# Altium PCB TECLADO-G5-5A.pcbDoc.PcbDoc (part 4 of 4)
Units mil, origin at the board's own origin, x right, y up, seen from the top; angles counter-clockwise.
Board outline 3514 x 3456 mil, 2 copper layers (Top Layer, Bottom Layer); 59 components, 33 nets, 154 pads, 25 vias.
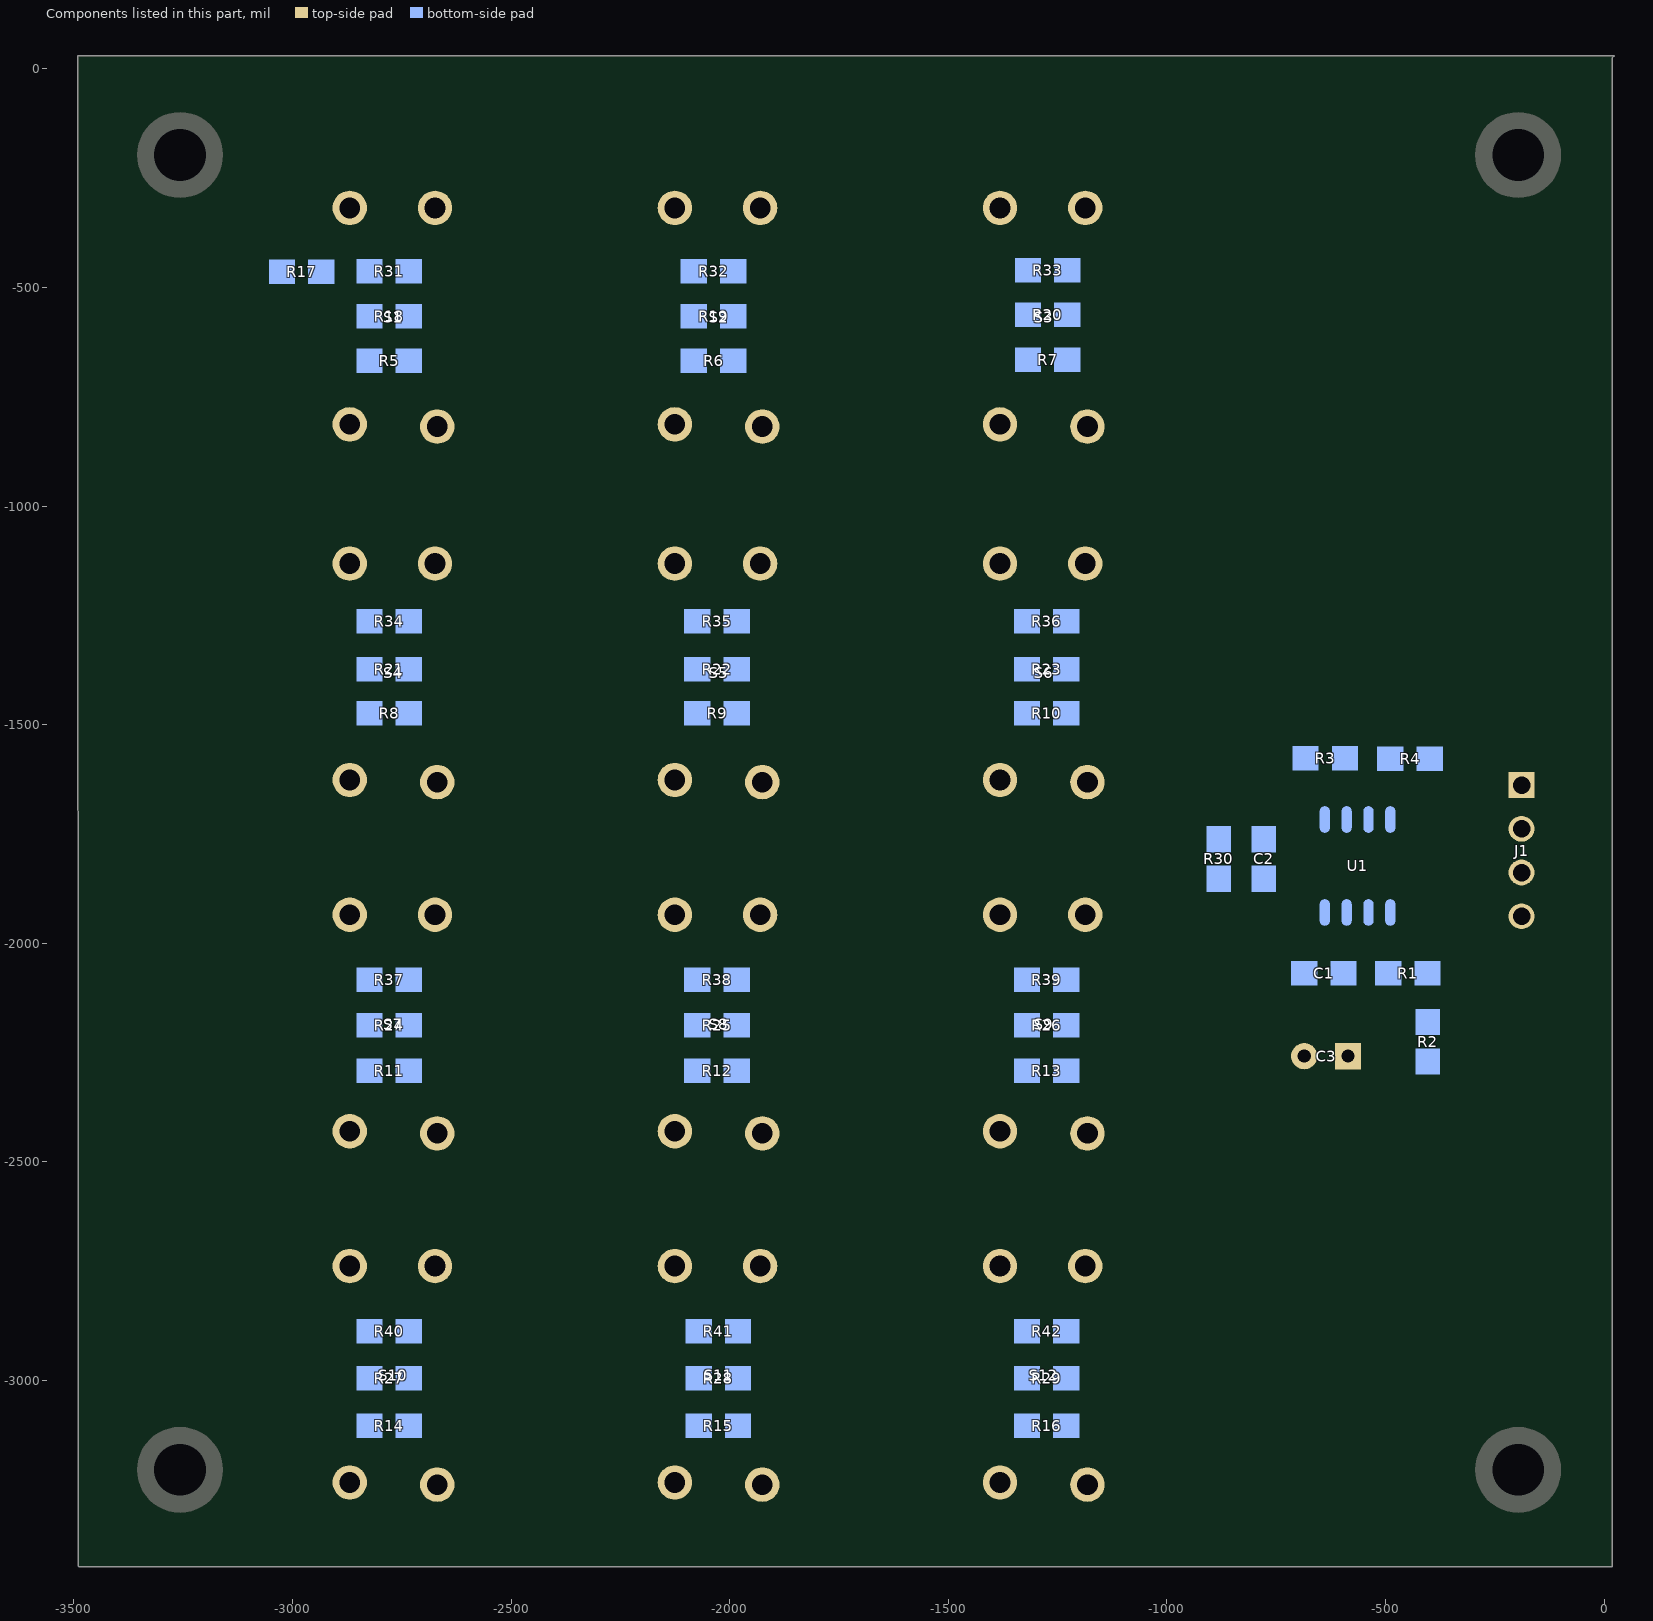
[diagram p4: the components of this part, seen from the top]

## Via types
v1: diameter 66.93, hole 39.37, Top Layer to Bottom Layer, 25 vias

## Nets (pads, with @x,y where several pads share a name; then routed paths per layer and width w, separated by ;. In a path a pad name is that pad's centre, name@x,y a point inside that pad or via, vN(x,y) a via of type N, cw(c..) or ccw(c..) an arc to the next point about the centre after c; other vN are vias at no path point) (continued)
copper on no net: (continued)
  Top Layer w1: -402,-614 -393,-614 ; -402,-484 -395,-484 ; -401,-1021 -394,-1021 ; -401,-1020 -394,-1020 ; -401,-886 -393,-886 ; -401,-613 -391,-613 ; -401,-485 -394,-485 ; -401,-461 -394,-461 ; -400,-1024 -392,-1024 ; -400,-1023 -393,-1023 ; -400,-1022 -393,-1022 ; -400,-885 -393,-885 ; -400,-884 -392,-884 ; -400,-612 -390,-612 ; -400,-486 -395,-486 ; -400,-462 -393,-462 ; -399,-1025 -392,-1025 ; -399,-883 -391,-883 ; -399,-611 -389,-611 ; -399,-463 -391,-463 ; -398,-1027 -390,-1027 ; -398,-1026 -391,-1026 ; -398,-882 -390,-882 ; -398,-803 -367,-803 ; -398,-464 -390,-464 ; -397,-1029 -390,-1029 ; -397,-1028 -390,-1028 ; -397,-881 -389,-881 ; -397,-610 -388,-610 ; -396,-1032 -389,-1032 ; -396,-1031 -389,-1031 ; -396,-1030 -389,-1030 ; -396,-880 -388,-880 ; -396,-879 -387,-879 ; -396,-609 -387,-609 ; -396,-465 -389,-465 ; -395,-1033 -387,-1033 ; -395,-878 -386,-878 ; -395,-466 -388,-466 ; -394,-1035 -387,-1035 ; -394,-1034 -387,-1034 ; -394,-877 -386,-877 ; -394,-608 -386,-608 ; -394,-467 -386,-467 ; -393,-1038 -385,-1038 ; -393,-1037 -386,-1037 ; -393,-1036 -386,-1036 ; -393,-876 -385,-876 ; -393,-616 -382,-616 ; -393,-607 -385,-607 ; -393,-476 -383,-476 ; -393,-468 -385,-468 ; -392,-1039 -385,-1039 ; -392,-875 -383,-875 ; -392,-606 -383,-606 ; -391,-1041 -384,-1041 ; -391,-1040 -385,-1040 ; -391,-874 -382,-874 ; -391,-615 -379,-615 ; -391,-605 -382,-605 ; -391,-475 -390,-475 ; -391,-469 -383,-469 ; -390,-1043 -383,-1043 ; -390,-1042 -383,-1042 ; -390,-873 -382,-873 ; -390,-872 -382,-872 ; -390,-604 -381,-604 ; -389,-1046 -382,-1046 ; -389,-1045 -382,-1045 ; -389,-1044 -382,-1044 ; -389,-871 -380,-871 ; -389,-603 -380,-603 ; -389,-475 -381,-475 ; -389,-470 -381,-470 ; -388,-1047 -381,-1047 ; -388,-870 -379,-870 ; -388,-835 -351,-835 ; -388,-802 -362,-802 ; -388,-614 -378,-614 ; -388,-602 -379,-602 ; -388,-471 -380,-471 ; -387,-1050 -380,-1050 ; -387,-1049 -380,-1049 ; -387,-1048 -380,-1048 ; -387,-613 -377,-613 ; -387,-510 -368,-510 ; -387,-474 -380,-474 ; -386,-1052 -379,-1052 ; -386,-1051 -379,-1051 ; -386,-869 -379,-869 ; -386,-868 -378,-868 ; -386,-601 -378,-601 ; -386,-600 -377,-600 ; -386,-472 -379,-472 ; -385,-1054 -378,-1054 ; -385,-1053 -378,-1053 ; -385,-867 -378,-867 ; -385,-866 -376,-866 ; -385,-612 -375,-612 ; -385,-599 -376,-599 ; -385,-473 -379,-473 ; -384,-1056 -377,-1056 ; -384,-1055 -378,-1055 ; -384,-865 -376,-865 ; -383,-1058 -376,-1058 ; -383,-1057 -377,-1057 ; -383,-864 -376,-864 ; -383,-598 -375,-598 ; -382,-1061 -375,-1061 ; -382,-1060 -375,-1060 ; -382,-1059 -376,-1059 ; -382,-863 -375,-863 ; -382,-862 -375,-862 ; -382,-611 -374,-611 ; -382,-597 -374,-597 ; -381,-1063 -374,-1063 ; -381,-1062 -375,-1062 ; -381,-861 -374,-861 ; -381,-610 -373,-610 ; -381,-596 -374,-596 ; -381,-511 -365,-511 ; -380,-1065 -373,-1065 ; -380,-1064 -374,-1064 ; -380,-860 -374,-860 ; -380,-859 -373,-859 ; -380,-801 -357,-801 ; -380,-595 -373,-595 ; -379,-1068 -372,-1068 ; -379,-1067 -372,-1067 ; -379,-1066 -373,-1066 ; -379,-858 -373,-858 ; -379,-857 -372,-857 ; -379,-609 -372,-609 ; -379,-594 -372,-594 ; -378,-1070 -371,-1070 ; -378,-1069 -372,-1069 ; -378,-856 -372,-856 ; -378,-855 -372,-855 ; -378,-854 -371,-854 ; -378,-853 -371,-853 ; -378,-608 -370,-608 ; -378,-593 -371,-593 ; -377,-1072 -371,-1072 ; -377,-1071 -371,-1071 ; -377,-852 -371,-852 ; -377,-592 -371,-592 ; -377,-512 -363,-512 ; -376,-1074 -369,-1074 ; -376,-1073 -370,-1073 ; -376,-967 -356,-967 ; -376,-966 -351,-966 ; -376,-965 -350,-965 ; -376,-851 -370,-851 ; -376,-850 -370,-850 ; -376,-849 -369,-849 ; -376,-848 -369,-848 ; -376,-607 -369,-607 ; -376,-591 -370,-591 ; -376,-590 -369,-590 ; -375,-1077 -368,-1077 ; -375,-1076 -369,-1076 ; -375,-1075 -369,-1075 ; -375,-847 -369,-847 ; -375,-846 -369,-846 ; -375,-845 -369,-845 ; -375,-844 -369,-844 ; -375,-843 -369,-843 ; -375,-589 -369,-589 ; -375,-513 -362,-513 ; -374,-1079 -368,-1079 ; -374,-1078 -368,-1078 ; -374,-842 -368,-842 ; -374,-841 -368,-841 ; -374,-840 -368,-840 ; -374,-606 -368,-606 ; -374,-588 -369,-588 ; -374,-587 -368,-587 ; -373,-1081 -367,-1081 ; -373,-1080 -368,-1080 ; -373,-834 -347,-834 ; -373,-800 -347,-800 ; -373,-605 -367,-605 ; -373,-586 -368,-586 ; -373,-585 -368,-585 ; -372,-1084 -366,-1084 ; -372,-1083 -367,-1083 ; -372,-1082 -367,-1082 ; -372,-604 -367,-604 ; -372,-584 -368,-584 ; -372,-583 -367,-583 ; -372,-582 -367,-582 ; -372,-514 -360,-514 ; -371,-1087 -365,-1087 ; -371,-1086 -365,-1086 ; -371,-1085 -366,-1085 ; -371,-603 -366,-603 ; -371,-581 -366,-581 ; -371,-580 -367,-580 ; -371,-579 -367,-579 ; -371,-578 -367,-578 ; -370,-1089 -364,-1089 ; -370,-1088 -365,-1088 ; -370,-577 -367,-577 ; -369,-1093 -363,-1093 ; -369,-1092 -364,-1092 ; -369,-1091 -364,-1091 ; -369,-1090 -364,-1090 ; -369,-799 -347,-799 ; -369,-602 -365,-602 ; -369,-576 -367,-576 ; -369,-575 -367,-575 ; -369,-574 -367,-574 ; -369,-573 -367,-573 ; -368,-1096 -362,-1096 ; -368,-1095 -362,-1095 ; -368,-1094 -363,-1094 ; -368,-601 -365,-601 ; -368,-515 -358,-515 ; -367,-1099 -361,-1099 ; -367,-1098 -362,-1098 ; -367,-1097 -362,-1097 ; -367,-964 -346,-964 ; -367,-600 -365,-600 ; -367,-516 -357,-516 ; -366,-1101 -361,-1101 ; -366,-1100 -361,-1100 ; -365,-1106 -360,-1106 ; -365,-1105 -360,-1105 ; -365,-1104 -360,-1104 ; -365,-1103 -361,-1103 ; -365,-1102 -361,-1102 ; -365,-833 -347,-833 ; -365,-798 -347,-798 ; -365,-517 -356,-517 ; -364,-1109 -353,-1109 ; -364,-1108 -356,-1108 ; -364,-1107 -359,-1107 ; -363,-1110 -352,-1110 ; -363,-518 -355,-518 ; -362,-1111 -348,-1111 ; -361,-519 -354,-519 ; -360,-1112 -345,-1112 ; -360,-520 -353,-520 ; -359,-797 -345,-797 ; -359,-521 -352,-521 ; -358,-963 -343,-963 ; -358,-832 -347,-832 ; -358,-522 -351,-522 ; -357,-1113 -342,-1113 ; -357,-840 -350,-840 ; -357,-839 -351,-839 ; -357,-838 -351,-838 ; -357,-837 -351,-837 ; -357,-524 -350,-524 ; -357,-523 -351,-523 ; -356,-841 -350,-841 ; -356,-831 -347,-831 ; -356,-525 -349,-525 ; -355,-1114 -339,-1114 ; -355,-845 -349,-845 ; -355,-844 -349,-844 ; -355,-843 -350,-843 ; -355,-842 -350,-842 ; -355,-526 -348,-526 ; -354,-849 -347,-849 ; -354,-848 -348,-848 ; -354,-847 -348,-847 ; -354,-846 -349,-846 ; -354,-796 -342,-796 ; -354,-527 -348,-527 ; -353,-1115 -337,-1115 ; -353,-962 -341,-962 ; -353,-852 -347,-852 ; -353,-851 -347,-851 ; -353,-850 -347,-850 ; -353,-529 -346,-529 ; -353,-528 -347,-528 ; -352,-854 -346,-854 ; -352,-853 -346,-853 ; -352,-830 -347,-830 ; -352,-704 -350,-704 ; -352,-666 -350,-666 ; -352,-665 -350,-665 ; -352,-664 -349,-664 ; -352,-530 -346,-530 ; -351,-858 -345,-858 ; -351,-857 -345,-857 ; -351,-856 -346,-856 ; -351,-855 -346,-855 ; -351,-829 -347,-829 ; -351,-828 -347,-828 ; -351,-827 -347,-827 ; -351,-826 -347,-826 ; -351,-825 -346,-825 ; -351,-824 -346,-824 ; -351,-823 -346,-823 ; -351,-822 -346,-822 ; -351,-821 -346,-821 ; -351,-820 -346,-820 ; -351,-819 -346,-819 ; -351,-818 -346,-818 ; -351,-817 -346,-817 ; -351,-816 -346,-816 ; -351,-815 -346,-815 ; -351,-814 -346,-814 ; -351,-813 -346,-813 ; -351,-812 -346,-812 ; -351,-811 -346,-811 ; -351,-810 -346,-810 ; -351,-809 -347,-809 ; -351,-808 -347,-808 ; -351,-807 -347,-807 ; -351,-806 -347,-806 ; -351,-805 -347,-805 ; -351,-804 -347,-804 ; -351,-803 -347,-803 ; -351,-802 -347,-802 ; -351,-801 -347,-801 ; -351,-705 -350,-705 ; -351,-703 -349,-703 ; -351,-702 -348,-702 ; -351,-663 -348,-663 ; -351,-662 -348,-662 ; -351,-531 -345,-531 ; -350,-1116 -334,-1116 ; -350,-961 -339,-961 ; -350,-862 -343,-862 ; -350,-861 -344,-861 ; -350,-860 -344,-860 ; -350,-859 -344,-859 ; -350,-795 -341,-795 ; -350,-701 -347,-701 ; -350,-700 -346,-700 ; -350,-661 -348,-661 ; -350,-660 -347,-660 ; -350,-659 -347,-659 ; -350,-658 -346,-658 ; -350,-533 -343,-533 ; -350,-532 -344,-532 ; -349,-866 -343,-866 ; -349,-865 -343,-865 ; -349,-864 -343,-864 ; -349,-863 -343,-863 ; -349,-794 -340,-794 ; -349,-699 -346,-699 ; -349,-657 -346,-657 ; -349,-656 -346,-656 ; -349,-655 -345,-655 ; -349,-534 -343,-534 ; -348,-868 -342,-868 ; -348,-867 -342,-867 ; -348,-698 -345,-698 ; -348,-697 -344,-697 ; -348,-654 -344,-654 ; -348,-653 -344,-653 ; -348,-535 -342,-535 ; -347,-960 -337,-960 ; -347,-872 -341,-872 ; -347,-871 -341,-871 ; -347,-870 -342,-870 ; -347,-869 -342,-869 ; -347,-696 -338,-696 ; -347,-695 -337,-695 ; -347,-652 -344,-652 ; -347,-651 -344,-651 ; -347,-650 -343,-650 ; -347,-649 -343,-649 ; -347,-537 -340,-537 ; -347,-536 -341,-536 ; -346,-1117 -330,-1117 ; -346,-876 -340,-876 ; -346,-875 -340,-875 ; -346,-874 -340,-874 ; -346,-873 -340,-873 ; -346,-694 -337,-694 ; -346,-693 -337,-693 ; -346,-692 -337,-692 ; -346,-648 -343,-648 ; -346,-647 -342,-647 ; -346,-646 -342,-646 ; -346,-645 -342,-645 ; -346,-538 -340,-538 ; -345,-879 -339,-879 ; -345,-878 -339,-878 ; -345,-877 -339,-877 ; -345,-793 -340,-793 ; -345,-792 -340,-792 ; -345,-773 -340,-773 ; -345,-772 -340,-772 ; -345,-771 -340,-771 ; -345,-770 -340,-770 ; -345,-769 -340,-769 ; -345,-768 -340,-768 ; -345,-767 -340,-767 ; -345,-766 -340,-766 ; -345,-765 -340,-765 ; -345,-764 -330,-764 ; -345,-763 -325,-763 ; -345,-762 -323,-762 ; -345,-761 -321,-761 ; -345,-760 -340,-760 ; -345,-759 -340,-759 ; -345,-758 -340,-758 ; -345,-757 -340,-757 ; -345,-756 -340,-756 ; -345,-755 -340,-755 ; -345,-754 -340,-754 ; -345,-753 -340,-753 ; -345,-752 -340,-752 ; -345,-751 -340,-751 ; -345,-750 -340,-750 ; -345,-749 -340,-749 ; -345,-748 -340,-748 ; -345,-747 -340,-747 ; -345,-746 -340,-746 ; -345,-745 -340,-745 ; -345,-744 -340,-744 ; -345,-743 -340,-743 ; -345,-742 -340,-742 ; -345,-741 -340,-741 ; -345,-740 -340,-740 ; -345,-739 -340,-739 ; -345,-738 -339,-738 ; -345,-737 -339,-737 ; -345,-736 -339,-736 ; -345,-735 -339,-735 ; -345,-734 -339,-734 ; -345,-691 -337,-691 ; -345,-644 -341,-644 ; -345,-643 -341,-643 ; -345,-539 -339,-539 ; -344,-959 -336,-959 ; -344,-882 -338,-882 ; -344,-881 -339,-881 ; -344,-880 -339,-880 ; -344,-791 -340,-791 ; -344,-790 -340,-790 ; -344,-789 -340,-789 ; -344,-788 -340,-788 ; -344,-787 -340,-787 ; -344,-786 -340,-786 ; -344,-785 -340,-785 ; -344,-784 -340,-784 ; -344,-783 -340,-783 ; -344,-782 -340,-782 ; -344,-781 -340,-781 ; -344,-780 -340,-780 ; -344,-779 -340,-779 ; -344,-778 -330,-778 ; -344,-777 -327,-777 ; -344,-776 -323,-776 ; -344,-775 -322,-775 ; -344,-774 -339,-774 ; -344,-733 -339,-733 ; -344,-732 -339,-732 ; -344,-731 -339,-731 ; -344,-730 -339,-730 ; -344,-729 -339,-729 ; -344,-728 -339,-728 ; -344,-727 -339,-727 ; -344,-726 -339,-726 ; -344,-725 -339,-725 ; -344,-724 -339,-724 ; -344,-723 -339,-723 ; -344,-722 -339,-722 ; -344,-721 -339,-721 ; -344,-720 -339,-720 ; -344,-719 -339,-719 ; -344,-718 -339,-718 ; -344,-717 -339,-717 ; -344,-716 -339,-716 ; -344,-715 -339,-715 ; -344,-714 -339,-714 ; -344,-713 -339,-713 ; -344,-712 -339,-712 ; -344,-711 -339,-711 ; -344,-710 -339,-710 ; -344,-709 -339,-709 ; -344,-708 -339,-708 ; -344,-707 -339,-707 ; -344,-706 -338,-706 ; -344,-705 -338,-705 ; -344,-704 -338,-704 ; -344,-690 -337,-690 ; -344,-689 -337,-689 ; -344,-642 -340,-642 ; -344,-641 -340,-641 ; -344,-640 -340,-640 ; -344,-541 -338,-541 ; -344,-540 -338,-540 ; -343,-887 -337,-887 ; -343,-886 -337,-886 ; -343,-885 -337,-885 ; -343,-884 -337,-884 ; -343,-883 -338,-883 ; -343,-703 -338,-703 ; -343,-702 -338,-702 ; -343,-701 -338,-701 ; -343,-700 -338,-700 ; -343,-699 -338,-699 ; -343,-698 -338,-698 ; -343,-697 -338,-697 ; -343,-688 -337,-688 ; -343,-687 -337,-687 ; -343,-686 -337,-686 ; -343,-639 -340,-639 ; -343,-638 -339,-638 ; -343,-637 -339,-637 ; -343,-636 -339,-636 ; -343,-635 -339,-635 ; -343,-542 -337,-542 ; -342,-1118 -326,-1118 ; -342,-958 -335,-958 ; -342,-892 -336,-892 ; -342,-891 -336,-891 ; -342,-890 -336,-890 ; -342,-889 -336,-889 ; -342,-888 -336,-888 ; -342,-685 -337,-685 ; -342,-684 -337,-684 ; -342,-634 -338,-634 ; -342,-633 -337,-633 ; -342,-632 -337,-632 ; -342,-631 -337,-631 ; -342,-630 -337,-630 ; -342,-543 -336,-543 ; -341,-1119 -325,-1119 ; -341,-895 -335,-895 ; -341,-894 -335,-894 ; -341,-893 -336,-893 ; -341,-683 -337,-683 ; -341,-682 -336,-682 ; -341,-629 -337,-629 ; -341,-628 -336,-628 ; -341,-545 -334,-545 ; -341,-544 -335,-544 ; -340,-957 -334,-957 ; -340,-899 -334,-899 ; -340,-898 -335,-898 ; -340,-897 -335,-897 ; -340,-896 -335,-896 ; -340,-681 -336,-681 ; -340,-680 -335,-680 ; -340,-679 -335,-679 ; -340,-627 -336,-627 ; -340,-626 -336,-626 ; -340,-625 -336,-625 ; -340,-624 -335,-624 ; -340,-546 -334,-546 ; -339,-956 -334,-956 ; -339,-906 -333,-906 ; -339,-905 -333,-905 ; -339,-904 -333,-904 ; -339,-903 -333,-903 ; -339,-902 -333,-902 ; -339,-901 -333,-901 ; -339,-900 -334,-900 ; -339,-678 -334,-678 ; -339,-677 -334,-677 ; -339,-676 -333,-676 ; -339,-623 -335,-623 ; -339,-622 -335,-622 ; -339,-621 -335,-621 ; -339,-620 -335,-620 ; -339,-619 -334,-619 ; -339,-547 -333,-547 ; -338,-955 -333,-955 ; -338,-954 -333,-954 ; -338,-908 -332,-908 ; -338,-907 -333,-907 ; -338,-675 -333,-675 ; -338,-674 -333,-674 ; -338,-618 -334,-618 ; -338,-617 -333,-617 ; -338,-613 -333,-613 ; -338,-549 -331,-549 ; -338,-548 -332,-548 ; -337,-1120 -321,-1120 ; -337,-953 -333,-953 ; -337,-952 -332,-952 ; -337,-915 -331,-915 ; -337,-914 -332,-914 ; -337,-913 -332,-913 ; -337,-912 -332,-912 ; -337,-911 -332,-911 ; -337,-910 -332,-910 ; -337,-909 -332,-909 ; -337,-673 -332,-673 ; -337,-672 -332,-672 ; -337,-671 -332,-671 ; -337,-616 -333,-616 ; -337,-615 -333,-615 ; -337,-614 -333,-614 ; -337,-612 -333,-612 ; -337,-611 -332,-611 ; -337,-550 -330,-550 ; -336,-951 -332,-951 ; -336,-950 -332,-950 ; -336,-949 -332,-949 ; -336,-948 -332,-948 ; -336,-947 -332,-947 ; -336,-946 -331,-946 ; -336,-925 -324,-925 ; -336,-924 -325,-924 ; -336,-923 -326,-923 ; -336,-922 -326,-922 ; -336,-921 -328,-921 ; -336,-920 -328,-920 ; -336,-919 -329,-919 ; -336,-918 -329,-918 ; -336,-917 -330,-917 ; -336,-916 -331,-916 ; -336,-670 -331,-670 ; -336,-669 -330,-669 ; -336,-668 -331,-668 ; -336,-610 -332,-610 ; -336,-609 -332,-609 ; -336,-608 -332,-608 ; -336,-607 -332,-607 ; -336,-606 -332,-606 ; -336,-605 -332,-605 ; -336,-604 -332,-604 ; -336,-603 -332,-603 ; -336,-602 -332,-602 ; -336,-601 -332,-601 ; -336,-600 -332,-600 ; -336,-599 -332,-599 ; -336,-598 -332,-598 ; -336,-597 -332,-597 ; -336,-596 -332,-596 ; -336,-595 -332,-595 ; -336,-594 -332,-594 ; -336,-593 -332,-593 ; -336,-592 -332,-592 ; -336,-591 -332,-591 ; -336,-590 -332,-590 ; -336,-589 -332,-589 ; -336,-588 -332,-588 ; -336,-587 -332,-587 ; -336,-586 -332,-586 ; -336,-585 -332,-585 ; -336,-584 -332,-584 ; -336,-583 -332,-583 ; -336,-582 -332,-582 ; -336,-581 -332,-581 ; -336,-580 -332,-580 ; -336,-579 -332,-579 ; -336,-578 -332,-578 ; -336,-577 -332,-577 ; -336,-576 -332,-576 ; -336,-575 -332,-575 ; -336,-574 -332,-574 ; -336,-573 -332,-573 ; -336,-572 -332,-572 ; -336,-571 -332,-571 ; -336,-570 -333,-570 ; -336,-569 -333,-569 ; -336,-568 -333,-568 ; -336,-567 -333,-567 ; -336,-566 -333,-566 ; -336,-565 -333,-565 ; -336,-564 -334,-564 ; -336,-563 -334,-563 ; -336,-562 -335,-562 ; -336,-551 -329,-551 ; -335,-945 -331,-945 ; -335,-944 -331,-944 ; -335,-943 -331,-943 ; -335,-942 -331,-942 ; -335,-941 -331,-941 ; -335,-940 -331,-940 ; -335,-939 -331,-939 ; -335,-938 -330,-938 ; -335,-937 -330,-937 ; -335,-936 -330,-936 ; -335,-935 -331,-935 ; -335,-934 -331,-934 ; -335,-933 -331,-933 ; -335,-932 -330,-932 ; -335,-931 -330,-931 ; -335,-930 -331,-930 ; -335,-929 -331,-929 ; -335,-928 -322,-928 ; -335,-927 -322,-927 ; -335,-926 -323,-926 ; -335,-781 -315,-781 ; -335,-780 -325,-780 ; -335,-779 -330,-779 ; -335,-667 -330,-667 ; -335,-666 -330,-666 ; -335,-665 -329,-665 ; -335,-552 -328,-552 ; -334,-782 -316,-782 ; -334,-774 -301,-774 ; -334,-664 -329,-664 ; -334,-553 -327,-553 ; -333,-1121 -318,-1121 ; -333,-760 -319,-760 ; -333,-663 -329,-663 ; -333,-662 -328,-662 ; -333,-661 -327,-661 ; -333,-660 -319,-660 ; -333,-659 -319,-659 ; -333,-554 -326,-554 ; -332,-658 -320,-658 ; -332,-657 -320,-657 ; -332,-656 -320,-656 ; -332,-655 -319,-655 ; -332,-555 -325,-555 ; -331,-654 -326,-654 ; -331,-653 -326,-653 ; -331,-557 -323,-557 ; -331,-556 -324,-556 ; -330,-1122 -314,-1122 ; -330,-783 -317,-783 ; -330,-652 -325,-652 ; -330,-651 -325,-651 ; -330,-650 -325,-650 ; -330,-649 -325,-649 ; -330,-558 -322,-558 ; -329,-1123 -310,-1123 ; -329,-930 -321,-930 ; -329,-929 -321,-929 ; -329,-648 -325,-648 ; -329,-647 -324,-647 ; -329,-646 -324,-646 ; -329,-645 -324,-645 ; -329,-559 -321,-559 ; -328,-1124 -308,-1124 ; -328,-931 -319,-931 ; -328,-773 -306,-773 ; -328,-759 -317,-759 ; -328,-758 -323,-758 ; -328,-644 -324,-644 ; -328,-643 -324,-643 ; -328,-642 -323,-642 ; -328,-641 -323,-641 ; -328,-560 -320,-560 ; -327,-1126 -322,-1126 ; -327,-1125 -322,-1125 ; -327,-932 -318,-932 ; -327,-757 -323,-757 ; -327,-640 -322,-640 ; -327,-639 -322,-639 ; -327,-638 -322,-638 ; -326,-1127 -321,-1127 ; -326,-934 -316,-934 ; -326,-933 -317,-933 ; -326,-772 -311,-772 ; -326,-756 -322,-756 ; -326,-755 -321,-755 ; -326,-637 -322,-637 ; -326,-636 -321,-636 ; -326,-635 -319,-635 ; -326,-634 -318,-634 ; -326,-561 -319,-561 ; -325,-1129 -319,-1129 ; -325,-1128 -320,-1128 ; -325,-935 -316,-935 ; -325,-771 -313,-771 ; -325,-754 -307,-754 ; -325,-654 -318,-654 ; -325,-633 -318,-633 ; -325,-632 -317,-632 ; -325,-631 -316,-631 ; -325,-630 -315,-630 ; -325,-629 -321,-629 ; -325,-628 -320,-628 ; -325,-627 -320,-627 ; -325,-562 -318,-562 ; -324,-1130 -319,-1130 ; -324,-936 -315,-936 ; -324,-753 -305,-753 ; -324,-662 -318,-662 ; -324,-661 -318,-661 ; -324,-653 -317,-653 ; -324,-626 -320,-626 ; -324,-625 -319,-625 ; -324,-624 -319,-624 ; -324,-623 -319,-623 ; -324,-622 -319,-622 ; -324,-563 -317,-563 ; -323,-1131 -318,-1131 ; -323,-937 -314,-937 ; -323,-752 -303,-752 ; -323,-663 -317,-663 ; -323,-652 -316,-652 ; -323,-621 -319,-621 ; -323,-620 -319,-620 ; -323,-564 -316,-564 ; -322,-1133 -316,-1133 ; -322,-1132 -317,-1132 ; -322,-938 -313,-938 ; -322,-758 -314,-758 ; -322,-665 -316,-665 ; -322,-664 -316,-664 ; -322,-651 -314,-651 ; -322,-619 -318,-619 ; -322,-618 -318,-618 ; -322,-617 -318,-617 ; -322,-616 -318,-616 ; -322,-615 -318,-615 ; -322,-614 -318,-614 ; -322,-613 -318,-613 ; -322,-565 -315,-565 ; -321,-1134 -315,-1134 ; -321,-939 -312,-939 ; -321,-780 -314,-780 ; -321,-751 -301,-751 ; -321,-668 -314,-668 ; -321,-667 -315,-667 ; -321,-666 -315,-666 ; -321,-650 -313,-650 ; -321,-612 -318,-612 ; -321,-611 -318,-611 ; -321,-610 -318,-610 ; -321,-609 -317,-609 ; -321,-608 -317,-608 ; -321,-607 -317,-607 ; -321,-606 -317,-606 ; -321,-605 -317,-605 ; -321,-604 -317,-604 ; -321,-566 -314,-566 ; -320,-1135 -278,-1135 ; -320,-941 -310,-941 ; -320,-940 -311,-940 ; -320,-779 -314,-779 ; -320,-757 -313,-757 ; -320,-669 -314,-669 ; -320,-629 -314,-629 ; -320,-603 -317,-603 ; -320,-602 -317,-602 ; -320,-567 -313,-567 ; -319,-1136 -285,-1136 ; -319,-942 -309,-942 ; -319,-778 -313,-778 ; -319,-756 -311,-756 ; -319,-671 -312,-671 ; -319,-670 -313,-670 ; -319,-649 -312,-649 ; -319,-628 -313,-628 ; -319,-601 -317,-601 ; -319,-600 -317,-600 ; -319,-599 -317,-599 ; -319,-598 -317,-598 ; -319,-597 -317,-597 ; -319,-596 -317,-596 ; -319,-595 -317,-595 ; -319,-594 -317,-594 ; -319,-593 -317,-593 ; -319,-592 -317,-592 ; -319,-591 -317,-591 ; -319,-568 -312,-568 ; -318,-1137 -289,-1137 ; -318,-943 -308,-943 ; -318,-777 -313,-777 ; -318,-672 -312,-672 ; -318,-648 -311,-648 ; -318,-627 -313,-627 ; -318,-590 -317,-590 ; -318,-589 -317,-589 ; -318,-588 -317,-588 ; -318,-587 -317,-587 ; -318,-570 -310,-570 ; -318,-569 -311,-569 ; -317,-1138 -296,-1138 ; -317,-1125 -304,-1125 ; -317,-776 -292,-776 ; -317,-775 -295,-775 ; -317,-755 -309,-755 ; -317,-674 -311,-674 ; -317,-673 -311,-673 ; -317,-647 -310,-647 ; -317,-626 -312,-626 ; -317,-571 -309,-571 ; -316,-944 -307,-944 ; -316,-676 -310,-676 ; -316,-675 -311,-675 ; -316,-646 -309,-646 ; -316,-625 -311,-625 ; -316,-572 -308,-572 ; -315,-945 -306,-945 ; -315,-750 -312,-750 ; -315,-677 -310,-677 ; -315,-645 -308,-645 ; -315,-624 -310,-624 ; -315,-623 -310,-623 ; -315,-573 -307,-573 ; -314,-946 -305,-946 ; -314,-680 -308,-680 ; -314,-679 -308,-679 ; -314,-678 -309,-678 ; -314,-644 -307,-644 ; -314,-622 -309,-622 ; -314,-574 -307,-574 ; -313,-947 -304,-947 ; -313,-682 -307,-682 ; -313,-681 -307,-681 ; -313,-643 -306,-643 ; -313,-621 -308,-621 ; -313,-620 -307,-620 ; -313,-575 -306,-575 ; -312,-948 -303,-948 ; -312,-683 -306,-683 ; -312,-642 -305,-642 ; -312,-619 -307,-619 ; -312,-576 -305,-576 ; -311,-949 -302,-949 ; -311,-685 -305,-685 ; -311,-684 -306,-684 ; -311,-641 -304,-641 ; -311,-618 -306,-618 ; -311,-617 -305,-617 ; -311,-577 -304,-577 ; -310,-1126 -303,-1126 ; -310,-950 -300,-950 ; -310,-687 -304,-687 ; -310,-686 -304,-686 ; -310,-640 -303,-640 ; -310,-616 -305,-616 ; -310,-579 -302,-579 ; -310,-578 -303,-578 ; -309,-951 -299,-951 ; -309,-777 -256,-777 ; -309,-688 -304,-688 ; -309,-639 -303,-639 ; -309,-638 -302,-638 ; -309,-615 -304,-615 ; -309,-580 -301,-580 ; -308,-952 -298,-952 ; -308,-781 -303,-781 ; -308,-780 -303,-780 ; -308,-779 -303,-779 ; -308,-778 -247,-778 ; -308,-750 -298,-750 ; -308,-691 -302,-691 ; -308,-690 -303,-690 ; -308,-689 -303,-689 ; -308,-637 -301,-637 ; -308,-614 -304,-614 ; -308,-613 -303,-613 ; -307,-1149 -302,-1149 ; -307,-1148 -302,-1148 ; -307,-1147 -302,-1147 ; -307,-1146 -303,-1146 ; -307,-1145 -302,-1145 ; -307,-1144 -246,-1144 ; -307,-1143 -289,-1143 ; -307,-1142 -298,-1142 ; -307,-1141 -300,-1141 ; -307,-1140 -303,-1140 ; -307,-1139 -303,-1139 ; -307,-1134 -272,-1134 ; -307,-953 -297,-953 ; -307,-784 -302,-784 ; -307,-783 -303,-783 ; -307,-782 -303,-782 ; -307,-693 -301,-693 ; -307,-692 -302,-692 ; -307,-636 -300,-636 ; -307,-612 -303,-612 ; -307,-611 -302,-611 ; -307,-582 -300,-582 ; -307,-581 -300,-581 ; -306,-1154 -301,-1154 ; -306,-1153 -301,-1153 ; -306,-1152 -301,-1152 ; -306,-1151 -301,-1151 ; -306,-1150 -301,-1150 ; -306,-954 -296,-954 ; -306,-786 -286,-786 ; -306,-785 -294,-785 ; -306,-749 -292,-749 ; -306,-695 -301,-695 ; -306,-694 -301,-694 ; -306,-635 -299,-635 ; -306,-610 -301,-610 ; -306,-609 -301,-609 ; -306,-583 -299,-583 ; -305,-1156 -300,-1156 ; -305,-1155 -300,-1155 ; -305,-787 -286,-787 ; -305,-748 -292,-748 ; -305,-697 -300,-697 ; -305,-696 -300,-696 ; -305,-634 -299,-634 ; -305,-608 -300,-608 ; -305,-584 -299,-584 ; -304,-1159 -292,-1159 ; -304,-1158 -300,-1158 ; -304,-1157 -300,-1157 ; -304,-955 -295,-955 ; -304,-700 -299,-700 ; -304,-699 -299,-699 ; -304,-698 -300,-698 ; -304,-633 -298,-633 ; -304,-632 -297,-632 ; -304,-607 -300,-607 ; -304,-606 -300,-606 ; -304,-586 -297,-586 ; -304,-585 -298,-585 ; -303,-1161 -244,-1161 ; -303,-1160 -241,-1160 ; -303,-956 -293,-956 ; -303,-788 -287,-788 ; -303,-703 -297,-703 ; -303,-702 -298,-702 ; -303,-701 -298,-701 ; -303,-631 -296,-631 ; -303,-605 -299,-605 ; -303,-604 -299,-604 ; -303,-603 -298,-603 ; -303,-587 -296,-587 ; -302,-957 -292,-957 ; -302,-747 -292,-747 ; -302,-705 -297,-705 ; -302,-704 -297,-704 ; -302,-630 -296,-630 ; -302,-629 -295,-629 ; -302,-602 -298,-602 ; -302,-600 -297,-600 ; -302,-589 -295,-589 ; -302,-588 -296,-588 ; -301,-958 -291,-958 ; -301,-708 -296,-708 ; -301,-707 -296,-707 ; -301,-706 -296,-706 ; -301,-628 -294,-628 ; -301,-601 -297,-601 ; -301,-599 -297,-599 ; -300,-1162 -248,-1162 ; -300,-959 -290,-959 ; -300,-746 -292,-746 ; -300,-713 -294,-713 ; -300,-712 -294,-712 ; -300,-711 -295,-711 ; -300,-710 -295,-710 ; -300,-709 -296,-709 ; -300,-627 -294,-627 ; -300,-598 -297,-598 ; -300,-597 -290,-597 ; -300,-596 -291,-596 ; -300,-592 -293,-592 ; -300,-591 -294,-591 ; -300,-590 -295,-590 ; -299,-1145 -251,-1145 ; -299,-960 -289,-960 ; -299,-779 -245,-779 ; -299,-718 -293,-718 ; -299,-717 -293,-717 ; -299,-716 -293,-716 ; -299,-715 -294,-715 ; -299,-714 -294,-714 ; -299,-626 -288,-626 ; -299,-625 -288,-625 ; -299,-595 -292,-595 ; -299,-594 -292,-594 ; -299,-593 -293,-593 ; -298,-961 -288,-961 ; -298,-719 -293,-719 ; -298,-624 -289,-624 ; -297,-726 -292,-726 ; -297,-725 -292,-725 ; -297,-724 -292,-724 ; -297,-723 -292,-723 ; -297,-722 -292,-722 ; -297,-721 -293,-721 ; -297,-720 -293,-720 ; -297,-623 -289,-623 ; -297,-622 -289,-622 ; -296,-1133 -267,-1133 ; -296,-962 -287,-962 ; -296,-735 -292,-735 ; -296,-734 -292,-734 ; -296,-733 -292,-733 ; -296,-732 -292,-732 ; -296,-731 -292,-731 ; -296,-730 -292,-730 ; -296,-729 -292,-729 ; -296,-728 -292,-728 ; -296,-727 -292,-727 ; -296,-621 -290,-621 ; -296,-620 -290,-620 ; -296,-598 -290,-598 ; -295,-1163 -254,-1163 ; -295,-1146 -256,-1146 ; -295,-963 -285,-963 ; -295,-751 -292,-751 ; -295,-750 -292,-750 ; -295,-745 -292,-745 ; -295,-743 -292,-743 ; -295,-741 -292,-741 ; -295,-740 -292,-740 ; -295,-739 -292,-739 ; -295,-738 -292,-738 ; -295,-737 -292,-737 ; -295,-736 -292,-736 ; -295,-619 -289,-619 ; -295,-618 -289,-618 ; -295,-600 -289,-600 ; -295,-599 -290,-599 ; -294,-752 -293,-752 ; -294,-744 -292,-744 ; -294,-742 -292,-742 ; -294,-617 -289,-617 ; -294,-602 -289,-602 ; -294,-601 -289,-601 ; -293,-1147 -258,-1147 ; -293,-1132 -265,-1132 ; -293,-964 -284,-964 ; -293,-785 -286,-785 ; -293,-616 -288,-616 ; -293,-615 -288,-615 ; -293,-614 -288,-614 ; -293,-604 -288,-604 ; -293,-603 -288,-603 ; -292,-965 -282,-965 ; -292,-780 -242,-780 ; -292,-628 -287,-628 ; -292,-627 -287,-627 ; -292,-613 -287,-613 ; -292,-612 -287,-612 ; -292,-611 -286,-611 ; -292,-607 -286,-607 ; -292,-606 -287,-606 ; -292,-605 -288,-605 ; -291,-966 -281,-966 ; -291,-781 -241,-781 ; -291,-630 -286,-630 ; -291,-629 -286,-629 ; -291,-610 -286,-610 ; -291,-609 -286,-609 ; -291,-608 -286,-608 ; -290,-784 -286,-784 ; -290,-783 -285,-783 ; -290,-782 -285,-782 ; -290,-633 -285,-633 ; -290,-632 -285,-632 ; -290,-631 -286,-631 ; -289,-967 -280,-967 ; -289,-635 -284,-635 ; -289,-634 -284,-634 ; -288,-1116 -269,-1116 ; -288,-968 -279,-968 ; -288,-638 -283,-638 ; -288,-637 -283,-637 ; -288,-636 -284,-636 ; -287,-1164 -263,-1164 ; -287,-1117 -277,-1117 ; -287,-640 -282,-640 ; -287,-639 -283,-639 ; -286,-1131 -261,-1131 ; -286,-969 -277,-969 ; -286,-644 -282,-644 ; -286,-643 -282,-643 ; -286,-642 -282,-642 ; -286,-641 -282,-641 ; -285,-648 -280,-648 ; -285,-647 -281,-647 ; -285,-646 -281,-646 ; -285,-645 -281,-645 ; -284,-970 -276,-970 ; -284,-649 -279,-649 ; -283,-1165 -268,-1165 ; -283,-971 -275,-971 ; -283,-654 -280,-654 ; -283,-653 -275,-653 ; -283,-652 -276,-652 ; -283,-651 -277,-651 ; -283,-650 -278,-650 ; -282,-972 -273,-972 ; -282,-657 -281,-657 ; -282,-656 -280,-656 ; -282,-655 -280,-655 ; -281,-1148 -270,-1148 ; -280,-1130 -257,-1130 ; -280,-1115 -263,-1115 ; -279,-973 -271,-973 ; -279,-654 -273,-654 ; -278,-974 -269,-974 ; -278,-655 -272,-655 ; -277,-975 -268,-975 ; -277,-783 -272,-783 ; -277,-782 -272,-782 ; -277,-656 -270,-656 ; -276,-1114 -259,-1114 ; -276,-786 -271,-786 ; -276,-785 -271,-785 ; -276,-784 -272,-784 ; -276,-657 -269,-657 ; -275,-1129 -253,-1129 ; -275,-976 -267,-976 ; -275,-788 -267,-788 ; -275,-787 -270,-787 ; -275,-658 -268,-658 ; -274,-789 -256,-789 ; -274,-659 -267,-659 ; -273,-1113 -257,-1113 ; -273,-977 -266,-977 ; -273,-790 -257,-790 ; -273,-660 -266,-660 ; -272,-791 -257,-791 ; -272,-754 -267,-754 ; -272,-753 -268,-753 ; -272,-752 -268,-752 ; -272,-751 -268,-751 ; -272,-750 -268,-750 ; -272,-749 -267,-749 ; -272,-748 -267,-748 ; -272,-661 -264,-661 ; -271,-980 -265,-980 ; -271,-979 -265,-979 ; -271,-978 -265,-978 ; -271,-755 -265,-755 ; -271,-747 -267,-747 ; -271,-746 -267,-746 ; -271,-745 -266,-745 ; -271,-744 -265,-744 ; -270,-1128 -250,-1128 ; -270,-983 -264,-983 ; -270,-982 -264,-982 ; -270,-981 -264,-981 ; -270,-756 -264,-756 ; -270,-743 -265,-743 ; -270,-742 -265,-742 ; -270,-741 -265,-741 ; -270,-740 -265,-740 ; -270,-739 -264,-739 ; -270,-662 -263,-662 ; -269,-984 -263,-984 ; -269,-757 -262,-757 ; -269,-738 -264,-738 ; -269,-663 -262,-663 ; -268,-1127 -248,-1127 ; -268,-1112 -254,-1112 ; -268,-988 -261,-988 ; -268,-987 -262,-987 ; -268,-986 -263,-986 ; -268,-985 -263,-985 ; -268,-758 -261,-758 ; -268,-737 -264,-737 ; -268,-736 -264,-736 ; -268,-735 -263,-735 ; -268,-734 -263,-734 ; -268,-733 -263,-733 ; -268,-732 -263,-732 ; -267,-1143 -243,-1143 ; -267,-991 -261,-991 ; -267,-990 -261,-990 ; -267,-989 -261,-989 ; -267,-731 -263,-731 ; -267,-730 -262,-730 ; -267,-729 -261,-729 ; -267,-728 -261,-728 ; -267,-727 -261,-727 ; -267,-664 -261,-664 ; -266,-993 -260,-993 ; -266,-992 -260,-992 ; -266,-792 -261,-792 ; -266,-759 -260,-759 ; -266,-726 -261,-726 ; -266,-665 -260,-665 ; -265,-1111 -251,-1111 ; -265,-997 -258,-997 ; -265,-996 -259,-996 ; -265,-995 -259,-995 ; -265,-994 -260,-994 ; -265,-725 -261,-725 ; -265,-724 -260,-724 ; -265,-723 -260,-723 ; -265,-722 -260,-722 ; -265,-721 -260,-721 ; -265,-666 -259,-666 ; -264,-1001 -257,-1001 ; -264,-1000 -257,-1000 ; -264,-999 -258,-999 ; -264,-998 -258,-998 ; -264,-760 -257,-760 ; -264,-720 -259,-720 ; -264,-719 -259,-719 ; -264,-718 -258,-718 ; -264,-717 -258,-717 ; -264,-716 -258,-716 ; -264,-667 -258,-667 ; -263,-1126 -245,-1126 ; -263,-1004 -256,-1004 ; -263,-1003 -257,-1003 ; -263,-1002 -257,-1002 ; -263,-761 -256,-761 ; -263,-715 -258,-715 ; -263,-714 -258,-714 ; -263,-713 -257,-713 ; -263,-712 -257,-712 ; -263,-711 -257,-711 ; -263,-668 -257,-668 ; -262,-1005 -256,-1005 ; -262,-788 -256,-788 ; -262,-762 -255,-762 ; -262,-710 -257,-710 ; -262,-709 -257,-709 ; -262,-669 -256,-669 ; -261,-1159 -238,-1159 ; -261,-1110 -248,-1110 ; -261,-1010 -254,-1010 ; -261,-1009 -254,-1009 ; -261,-1008 -255,-1008 ; -261,-1007 -256,-1007 ; -261,-1006 -256,-1006 ; -261,-763 -253,-763 ; -261,-708 -256,-708 ; -261,-707 -256,-707 ; -261,-706 -256,-706 ; -261,-705 -256,-705 ; -261,-704 -256,-704 ; -261,-703 -256,-703 ; -261,-671 -255,-671 ; -261,-670 -256,-670 ; -260,-1014 -253,-1014 ; -260,-1013 -253,-1013 ; -260,-1012 -254,-1012 ; -260,-1011 -254,-1011 ; -260,-787 -256,-787 ; -260,-786 -256,-786 ; -260,-785 -256,-785 ; -260,-784 -256,-784 ; -260,-783 -256,-783 ; -260,-782 -256,-782 ; -260,-702 -255,-702 ; -260,-701 -255,-701 ; -260,-700 -254,-700 ; -260,-699 -254,-699 ; -260,-698 -254,-698 ; -260,-697 -254,-697 ; -260,-672 -254,-672 ; -259,-1109 -246,-1109 ; -259,-1015 -253,-1015 ; -259,-764 -251,-764 ; -259,-696 -254,-696 ; -259,-695 -254,-695 ; -259,-694 -254,-694 ; -259,-693 -254,-693 ; -259,-673 -254,-673 ; -258,-1125 -242,-1125 ; -258,-1019 -251,-1019 ; -258,-1018 -252,-1018 ; -258,-1017 -252,-1017 ; -258,-1016 -253,-1016 ; -258,-692 -253,-692 ; -258,-691 -253,-691 ; -258,-690 -253,-690 ; -258,-689 -253,-689 ; -258,-688 -253,-688 ; -258,-687 -253,-687 ; -258,-686 -253,-686 ; -258,-685 -253,-685 ; -258,-677 -253,-677 ; -258,-676 -253,-676 ; -258,-675 -253,-675 ; -258,-674 -254,-674 ; -257,-1023 -251,-1023 ; -257,-1022 -251,-1022 ; -257,-1021 -251,-1021 ; -257,-1020 -251,-1020 ; -257,-765 -246,-765 ; -257,-684 -253,-684 ; -257,-683 -253,-683 ; -257,-682 -253,-682 ; -257,-681 -253,-681 ; -257,-680 -253,-680 ; -257,-679 -253,-679 ; -257,-678 -253,-678 ; -256,-1142 -241,-1142 ; -256,-1108 -244,-1108 ; -256,-1028 -249,-1028 ; -256,-1027 -250,-1027 ; -256,-1026 -250,-1026 ; -256,-1025 -250,-1025 ; -256,-1024 -250,-1024 ; -255,-1029 -249,-1029 ; -255,-766 -236,-766 ; -254,-1141 -239,-1141 ; -254,-1124 -240,-1124 ; -254,-1034 -247,-1034 ; -254,-1033 -248,-1033 ; -254,-1032 -248,-1032 ; -254,-1031 -249,-1031 ; -254,-1030 -249,-1030 ; -254,-767 -235,-767 ; -253,-1107 -242,-1107 ; -253,-1039 -247,-1039 ; -253,-1038 -247,-1038 ; -253,-1037 -247,-1037 ; -253,-1036 -247,-1036 ; -253,-1035 -247,-1035 ; -252,-1158 -235,-1158 ; -252,-1123 -238,-1123 ; -252,-1043 -246,-1043 ; -252,-1042 -246,-1042 ; -252,-1041 -246,-1041 ; -252,-1040 -246,-1040 ; -251,-1046 -245,-1046 ; -251,-1045 -245,-1045 ; -251,-1044 -246,-1044 ; -251,-768 -232,-768 ; -250,-1106 -240,-1106 ; -250,-1051 -244,-1051 ; -250,-1050 -245,-1050 ; -250,-1049 -245,-1049 ; -250,-1048 -245,-1048 ; -250,-1047 -245,-1047 ; -249,-1140 -237,-1140 ; -249,-1122 -236,-1122 ; -249,-1056 -243,-1056 ; -249,-1055 -243,-1055 ; -249,-1054 -243,-1054 ; -249,-1053 -243,-1053 ; -249,-1052 -244,-1052 ; -248,-1105 -232,-1105 ; -248,-1058 -243,-1058 ; -248,-1057 -243,-1057 ; -248,-782 -240,-782 ; -247,-1063 -242,-1063 ; -247,-1062 -242,-1062 ; -247,-1061 -242,-1061 ; -247,-1060 -242,-1060 ; -247,-1059 -243,-1059 ; -246,-1157 -233,-1157 ; -246,-1121 -231,-1121 ; -246,-1104 -232,-1104 ; -246,-1070 -240,-1070 ; -246,-1069 -241,-1069 ; -246,-1068 -241,-1068 ; -246,-1067 -242,-1067 ; -246,-1066 -242,-1066 ; -246,-1065 -242,-1065 ; -246,-1064 -242,-1064 ; -246,-783 -239,-783 ; -245,-1139 -235,-1139 ; -245,-1076 -240,-1076 ; -245,-1075 -240,-1075 ; -245,-1074 -240,-1074 ; -245,-1073 -240,-1073 ; -245,-1072 -240,-1072 ; -245,-1071 -240,-1071 ; -245,-769 -231,-769 ; -244,-1103 -233,-1103 ; -244,-1078 -240,-1078 ; -244,-1077 -240,-1077 ; -244,-784 -238,-784 ; -243,-1120 -231,-1120 ; -243,-1086 -238,-1086 ; -243,-1085 -239,-1085 ; -243,-1084 -239,-1084 ; -243,-1083 -239,-1083 ; -243,-1082 -239,-1082 ; -243,-1081 -239,-1081 ; -243,-1080 -239,-1080 ; -243,-1079 -240,-1079 ; -243,-785 -237,-785 ; -242,-1156 -231,-1156 ; -242,-1138 -233,-1138 ; -242,-1102 -233,-1102 ; -242,-1087 -237,-1087 ; -242,-786 -236,-786 ; -241,-1089 -235,-1089 ; -241,-1088 -236,-1088 ; -241,-787 -235,-787 ; -240,-1155 -230,-1155 ; -240,-1137 -228,-1137 ; -240,-1119 -230,-1119 ; -240,-1090 -235,-1090 ; -240,-788 -235,-788 ; -239,-1118 -229,-1118 ; -239,-1101 -232,-1101 ; -239,-1092 -233,-1092 ; -239,-1091 -234,-1091 ; -239,-789 -234,-789 ; -238,-1136 -228,-1136 ; -238,-1100 -232,-1100 ; -238,-1093 -232,-1093 ; -238,-790 -233,-790 ; -237,-1154 -228,-1154 ; -237,-1106 -231,-1106 ; -237,-1099 -230,-1099 ; -237,-1094 -232,-1094 ; -237,-791 -232,-791 ; -237,-770 -228,-770 ; -236,-1135 -228,-1135 ; -236,-1117 -229,-1117 ; -236,-1108 -231,-1108 ; -236,-1107 -231,-1107 ; -236,-1098 -230,-1098 ; -236,-1097 -230,-1097 ; -236,-1096 -231,-1096 ; -236,-1095 -231,-1095 ; -236,-793 -222,-793 ; -236,-792 -220,-792 ; -235,-1123 -230,-1123 ; -235,-1122 -230,-1122 ; -235,-1110 -230,-1110 ; -235,-1109 -230,-1109 ; -235,-794 -226,-794 ; -235,-771 -227,-771 ; -234,-1153 -228,-1153 ; -234,-1134 -228,-1134 ; -234,-1125 -229,-1125 ; -234,-1124 -229,-1124 ; -234,-1116 -228,-1116 ; -234,-1112 -229,-1112 ; -234,-1111 -229,-1111 ; -234,-795 -227,-795 ; -234,-772 -226,-772 ; -233,-1133 -228,-1133 ; -233,-1132 -228,-1132 ; -233,-1131 -228,-1131 ; -233,-1130 -228,-1130 ; -233,-1129 -229,-1129 ; -233,-1128 -229,-1128 ; -233,-1127 -229,-1127 ; -233,-1126 -229,-1126 ; -233,-1115 -228,-1115 ; -233,-1114 -228,-1114 ; -233,-1113 -229,-1113 ; -232,-1152 -228,-1152 ; -232,-1151 -228,-1151 ; -232,-1150 -228,-1150 ; -232,-1149 -228,-1149 ; -232,-1148 -228,-1148 ; -232,-1147 -228,-1147 ; -232,-1146 -228,-1146 ; -232,-1145 -228,-1145 ; -232,-1144 -228,-1144 ; -232,-1143 -228,-1143 ; -232,-1142 -228,-1142 ; -232,-1141 -228,-1141 ; -232,-1140 -228,-1140 ; -232,-1139 -228,-1139 ; -232,-1138 -228,-1138 ; -232,-773 -225,-773 ; -231,-774 -224,-774 ; -230,-775 -224,-775 ; -229,-791 -219,-791 ; -229,-776 -223,-776 ; -228,-777 -222,-777 ; -227,-779 -221,-779 ; -227,-778 -222,-778 ; -226,-790 -218,-790 ; -226,-780 -221,-780 ; -225,-782 -220,-782 ; -225,-781 -220,-781 ; -224,-789 -218,-789 ; -224,-785 -219,-785 ; -224,-784 -220,-784 ; -224,-783 -220,-783 ; -223,-788 -218,-788 ; -223,-787 -218,-787 ; -223,-786 -219,-786

## Polygon pours and split planes (outlines as drawn)
GND on Top Layer "Bottom Layer-No Net" (solid, remove dead copper, pour order 2): -3454,0 0,0 0,-3401 -3454,-3401
GND on Bottom Layer "Bottom Layer-No Net" (solid, remove dead copper, pour order 4): -3454,-8 0,-8 0,-3409 -3454,-3409

## Keep-outs
Keep-Out Layer:
  lines w15: -3454,-3401 0,-3401 0,0 -3454,0 -3454,-3401

## Other copper
Top Layer:
  text "+12V" at -387.8,-1660 h39.37
  text "OUT" at -355,-1765 h39.37
  text "GND" at -355,-1861 h39.37
  text "-12V" at -387.8,-1965 h39.37
  text "G5-2019" at -724.87,-2847 h60
  text "TECLADO" at -731.87,-2935 h60
  text "5to" at -603,-3024 h60
Bottom Layer:
  text "G5-2019" at -335,-2847 h60
  text "TECLADO" at -332,-2935 h60
  text "5to" at -460,-3023 h60

## Silkscreen, mask and mechanical layers (free items; w line width, h text height)
Mechanical 15:
  lines w15: -3489,-3426 22,-3426 22,30 -3489,30 -3489,-3426

## Text inside footprints (layer, text, board x,y; h text height)
C3: Top Overlay "+" at -569,-2309 h40 r180